# Altium PCB esp32_PCB1.PcbDoc (part 2 of 3)
Units mil, origin at the board's own origin, x right, y up, seen from the top; angles counter-clockwise.
Board outline 2700 x 1000 mil, 4 copper layers (L1, L2, L3, L4), stack 61.583 mil thick; 64 components, 75 nets, 299 pads, 140 vias.
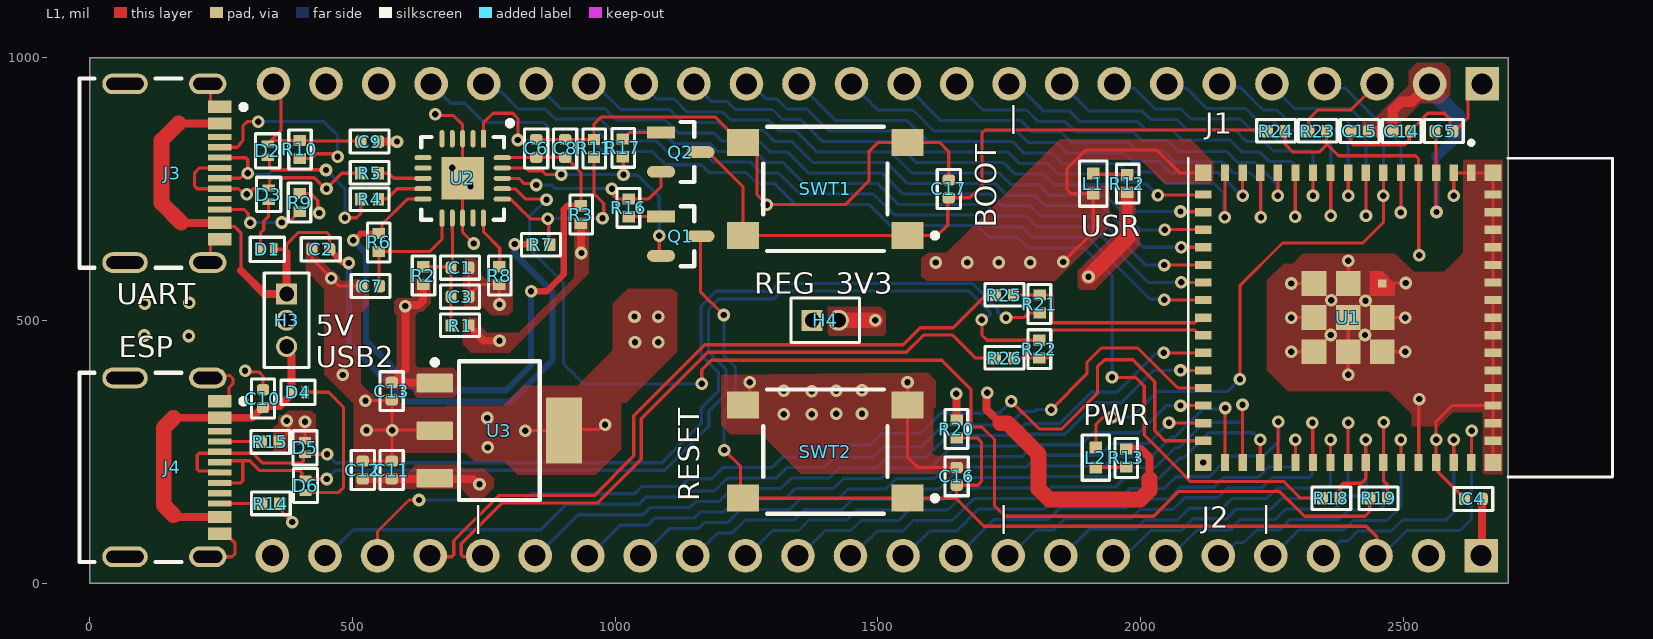
[diagram p0: L1 view]

## Via types
v1: diameter 24, hole 12, L1 to L4, tented both sides, 140 vias

## Nets (pads, with @x,y where several pads share a name; then routed paths per layer and width w, separated by ;. In a path a pad name is that pad's centre, name@x,y a point inside that pad or via, vN(x,y) a via of type N, cw(c..) or ccw(c..) an arc to the next point about the centre after c; other vN are vias at no path point) (continued)
+3V3: (continued)
  L1 w6: R3.2@935,684.14 R3.2@935.5,683.64 ; v1@935.5,628.5 v1(936,628) ; v1(1649,360) v1@1649.5,359.5 ; R20.2@1649.5,310.5 R20.2@1650,310 ; v1@1706.82,360.82 v1(1708,362) ; C5.1@2560,860 2562.36,857.64 U1.3@2562.36,780.55 v1@2562.36,706.64
  L1 w15: R1.2@721.93,490 721.93,488.82 749.75,461 v1(780,461) ; v1@935.5,628.5 R3.2@935.5,683.64 ; R20.2@1649.5,310.5 v1@1649.5,359.5 ; v1@1706.82,360.82 1706.82,330 1732.82,304 ; R13.2@1973,254.93 2001.07,254.93 2017,239 2017,198 ; H2.1@2650,50 C4.1@2650,160
  L1 w20: 1975,657 R12.2@1975,743.07 ; C15.2@2433.86,860 C14.2@2480,860 2480,900 2496,916 2516,916 H1.2@2550,950
  L1 w30: H4.2@1425,500 v1(1495,500) ; 1732.82,304 1747,304 1806,245 1806,179 1826,159 1999.43,159 2017,176.57 2017,198 ; v1(1901,583) 1975,657
  L2 w12: 2563,660 2578,645
  L2 w15: H2.1@2650,50 2650,152 2665,167
  L2 w20: v1(1649,360) 1650.08,360 1652.08,362 v1(1708,362) 1709.08,362 1725.08,378 1853,378 ; 2581,119 H2.1@2648,52 H2.1@2650,50 ; 2612,418 2664.17,365.83 ; 2664.17,365 2665,364.17 2665,167
  L2 w30: v1(780,461) 848,461 ; 975,589 v1(936,628) 994,628 1066,556 1235,556 1264,585 1407.43,585 1425,567.43 H4.2@1425,500 ; v1(1495,500) 1582,500 1649,433 v1(1649,360) ; v1(1708,362) 1708,266 1855,119 2581,119 ; 1853,378 1901,426 v1(1901,583) ; 2563,660 v1(2563,706)
  L2 w40: 848,461 951.57,461 975,484.43 975,589
  L2 w50: 2578,645 2612,611 2612,418
  L4 w6: v1@1900,584 v1(1901,583)
  L4 w12: v1(2563,706) 2563,811
  L4 w20: 2563,811 2603,851
  L4 w30: H1.2@2550,950 2550,940.8 2603,887.8 2603,851
+3V3_FTDI: C6.1 C8.1 R3.1 R6.1 U2.10 U2.20 | length 1335
  L1 w6: R6.1@556.33,670.63 556.33,682.33 604.63,730.63 U2.10@634.59,730.63 ; U2.20@785.41,809.37 785.64,809.6 849.53,809.6 C6.1@850,810.07 C8.1@905,810.07 906.18,810.07 935,781.25 R3.1@935,718
  L1 w12: v1@504,653 516,665 R6.1@550,665 ; v1(840.2,555.2) 870.2,555.2 902.49,587.49 902.49,710.97 909.52,718 R3.1@935,718
  L4 w12: v1(502,652) 526,628 526,461.14 620.14,367 792.89,367 840.2,414.31 v1(840.2,555.2)
+3V3_REG: C11.2 C12.2 H4.1 U3.3 | length 1021.4
  L1 w15: C12.2@520,198.07 C11.2@575,198.07 655.59,198.07 729.49,198.07 v1@739.56,188
  L2 w30: v1(742,188) 942.43,188 1036,281.57 1036,342 1144,450 1264,450 1314,500 H4.1@1375,500
+5V: C9.1 C13.1 H1.22 H3.2 R2.2 U3.1 | length 1025.8
  L1 w15: C9.1@550,840 v1(585,840) ; C13.1@575,381.93 576.18,381.93 601,406.75 v1(601,527) 602.72,528.72 626.21,528.72 635,537.51 R2.2@635,568.07 ; C13.1@575.69,381.24 656.28,381.24 U3.1@656.97,380.55
  L2 w20: 540,500 572.92,500 599.92,527 v1(601,527)
  L2 w30: H1.22@550,950 552,948 552,873 v1(585,840) 594,831 594,534 v1(601,527)
  L2 w40: H3.2@375,500 540,500
  L4 w15: v1(601,527) v1@601,529.44
+5V_VBUS1: C2.2 D1.1 H3.1 J3.A4B9 J3.B4A9 R7.2 | length 1787.6
  L1 w6: J3.B4A9@247.64,685.43 254.32,678.75 275.66,678.75 288,666.41 288,595 ; D1.1@350.59,635 369,635 375,629 375,645 397.07,667.07 451.07,667.07 456.93,661.21 C2.2@456.93,635 ; H3.1@375,550 H3.1@375,554.14
  L1 w12: C2.2@456.93,635 456.93,633.82 479.45,611.3 490.7,611.3 v1(493,609) ; v1(809,645) 809.5,644.5 841.5,644.5 R7.2@842,644
  L1 w15: 169.41,874.41 J3.A4B9@247.64,874.41 ; 174.57,685.43 J3.B4A9@247.64,685.43 ; 288,595 333,550 H3.1@375,550 ; H3.1@375,554.14 375,629
  L1 w30: 169.41,874.41 137,842 137,723 174.57,685.43
  L4 w12: v1(493,609) 493,456 604,345 802,345 881,424 881,554 809,626 v1(809,645)
+5V_VBUS2: C10.2 D4.1 H3.3 J4.A4B9 J4.B4A9 | length 627.9
  L1 w15: 160,129 163.41,125.59 J4.B4A9@247.64,125.59 ; 160,314.57 J4.A4B9@247.64,314.57 309.39,314.57 325.69,330.87 326.87,330.87 C10.2@330,334 333.13,337.13 362.24,337.13 384.41,359.3 D4.1@384.41,363 384.41,433.83 375,443.24 H3.3@375,450
  L1 w30: 160,129 141,148 141,295.57 160,314.57
+VCC_FTDI: C1.1 C3.1 R1.1 R2.1 U2.12 | length 259.6
  L1 w6: R2.1@635,601.93 686.14,601.93 C1.1@688.07,600 ; R1.1@688.07,490 C1.1@688.07,600 ; U2.12@690.32,694.59 690.32,668.31 690.63,668 690.63,602.56 C1.1@688.07,600
BTN_GPIO0: C17.2 Q2.3 R24.1 SWT1.1 SWT1.2 | length 1370.8
  L1 w6: Q2.3@1162.42,820 1177.88,820 1243.5,754.37 SWT1.2@1243.5,661.42 SWT1.1@1556.5,661.42 1613.42,661.42 1633,681 1633,731.07 C17.2@1635,733.07 1675.07,733.07 1698,756 1698,856.14 1703.86,862 2239.14,862 R24.1@2241.14,860
CHIP_PU: C16.1 H2.3 Q1.3 R20.1 SWT2.1 SWT2.2 U1.45 | length 2463.6
  L1 w6: Q1.3@1162.42,660 1162.42,554.58 v1(1207,510) ; v1(1208,253) 1238.58,222.42 1238.58,166.34 SWT2.2@1243.5,161.42 1650,161.42 ; R20.1@1650,276.14 1688.86,276.14 1697,268 1697,193 1690.14,186.14 1651.18,186.14 C16.1@1650,186.14 1650,160 1702,108 2429.14,108 2450,87.14 H2.3@2450,50 ; U1.45@2629.29,229.37 2629.6,229.68 2629.6,289.57 v1(2629.9,289.88)
  L4 w6: v1(1207,510) 1207.5,509.5 1207.5,432.54 1229.06,410.98 1229.06,349.06 1207.5,327.5 1207.5,253.5 v1(1208,253) ; H2.3@2450,50 2456.57,50 2506.57,100 2608,100 2629.9,121.9 v1(2629.9,289.88)
CON1_USB_N: D2.1 J3.A7 J3.B7 R4.1 | length 587.6
  L1 w6.23: J3.A7@247.64,770.08 286.27,770.08 296.19,780 v1(301,780) 301,805.35 297.35,809 248.09,809 J3.B7@247.64,809.45 ; D2.1@339,810 342.65,806.35 342.65,791.31 347.64,786.33 449.67,786.33 v1(450,786) ; v1(486,695) 508,695 516.14,703.14 R4.1@516.14,730
  L4 w6.23: v1(301,780) 303.68,777.32 340.32,777.32 349,786 v1(450,786) 486,750 v1(486,695)
CON1_USB_P: D3.1 J3.A6 J3.B6 R5.1 | length 441.5
  L1 w6.03: J3.A6@247.64,789.76 208.76,789.76 200,781 200,755 204.61,750.39 J3.B6@247.64,750.39 283.47,750.39 294.07,739.78 v1(298.94,739.78)
  L1 w6.23: v1(298.94,739.78) 300.75,739.78 311.16,750.2 338.8,750.2 339,750 342.65,753.65 342.65,767.35 346.3,771 427.6,771 448.6,750 v1(451,750) ; v1@451,751 480,780 R5.1@516.14,780
CON2_USB_N: D5.1 J4.A7 J4.B7 R21.1 | length 2040.3
  L1 w6.03: v1(1744,505) 1778,505 1787,514 R21.1@1808,514
  L1 w6.23: J4.A7@247.64,210.24 244.85,213.03 208.69,213.03 205.04,216.68 205.04,243.17 208.69,246.82 244.85,246.82 J4.B7@247.64,249.61 250.37,246.88 310.96,246.88 329.61,228.23 386.6,228.23 386.64,228.19 402.82,228.19 406.47,231.83 406.47,241.47 D5.1@410,245 v1(452,245)
  L4 w6.23: v1(452,245) 452,244.66 468.04,228.61 1088.61,228.61 1164,304 1164,333 1197,366 1197,400.12 1163.77,433.35 1163.77,527 1191.94,555.17 1296.83,555.17 1311.66,570 1679.31,570 1728.11,521.2 1728.11,514.14 1731.76,510.49 1733.7,510.49 1739.19,505 v1(1744,505)
CON2_USB_P: D6.1 J4.A6 J4.B6 R22.1 | length 2063.7
  L1 w6.03: v1(1698,501) 1698,472 1708.07,461.93 R22.1@1807,461.93
  L1 w6.23: J4.B6@247.64,190.55 J4.B6@250.43,193.34 ; J4.A6@247.64,229.92 250.37,232.65 291.39,232.65 ; J4.B6@250.43,190.55 287.35,190.55 291.39,194.59 291.39,232.65 ; v1(451.31,198) D6.1@411,198 407.62,198 403.85,201.77 403.85,210.31 400.2,213.96 380.75,213.96 380.7,214 323.72,214 305.07,232.65 291.39,232.65
  L4 w6.03: v1@1695.97,501 v1(1698,501)
  L4 w6.23: v1(451.31,198) 451.66,198 468.04,214.39 1094.51,214.39 1178.23,298.11 1178.23,327.11 1211.23,360.11 1211.23,406.02 1178,439.25 1178,521.11 1197.83,540.94 1302.73,540.94 1317.56,555.77 1673.42,555.77 1713.89,515.3 1713.89,510.14 1710.24,506.49 1708.3,506.49 1702.81,501 v1(1698,501)
CON_ESP_USB_N: H2.21 R25.1 | length 1341.1
  L1 w6.23: H2.21@650,50 689.24,50 692.89,53.65 692.89,80.89 778.36,166.36 960.36,166.36 1035.77,241.77 1035.77,318.27 1170.73,453.23 1548.23,453.23 1581,486 1643.11,486 1705.11,548 R25.1@1724.07,548
CON_ESP_USB_P: H2.20 R26.1 | length 1310.1
  L1 w6.23: H2.20@750,50 710.76,50 707.11,53.65 707.11,74.99 784.25,152.13 966.25,152.13 1050,235.88 1050,312.38 1176.62,439 1554.12,439 1586.89,471.77 1642.23,471.77 1686,428 R26.1@1724.14,428
CON_GPIO0: H1.3 R23.1 | length 185.8
  L1 w6: R23.1@2320,855 2320,883 2337,900 2400,900 H1.3@2450,950
DTR_FTDI: Q2.2 R16.2 U2.18 | length 362
  L1 w6: U2.18@785.41,770 811,770 817.26,770 827.14,760.12 847.32,760.12 v1(850,757.44) ; v1(994,750.47) 996.68,747.79 996.68,737.86 1003.61,730.93 1063.93,730.93 1087.58,754.58 Q2.2@1087.58,782.6
  L4 w6: v1(850,757.44) 879.47,757.44 886.45,750.47 v1(994,750.47)
ESP_USB_N: R21.2 R25.2 U1.23 | length 414.9
  L1 w6.03: R25.2@1757.93,548 1758.07,547.86 R21.2@1808,547.86 1827.29,547.86 1830.83,544.33 1830.83,498.78 1834.36,495.24 2103.18,495.24 2106.72,498.78 2106.72,500.1 2111.57,504.96 U1.23@2119.45,504.96
ESP_USB_P: R22.2 R26.2 U1.24 | length 415.2
  L1 w6.03: R26.2@1758,428 1758.07,428.07 R22.2@1807,428.07 1826.07,428.07 1829.83,431.83 1829.83,477.68 1833.36,481.21 2103.18,481.21 2106.72,477.68 2106.72,476.35 2111.57,471.5 U1.24@2119.45,471.5
FTDI_USB_N: R4.2 U2.9 | length 93
  L1 w6.23: R4.2@550,730 551.06,731.06 566.33,731.06 585.58,750.32 609,750.32 U2.9@634.59,750.32
FTDI_USB_P: R5.2 U2.8 | length 88.7
  L1 w6.23: R5.2@550,780 568.47,780 578.47,770 609,770 U2.8@634.59,770